# Altium PCB PCB3.PcbDoc
Units mil, origin at the board's own origin, x right, y up, seen from the top; angles counter-clockwise.
Board outline 3937.01 x 3937.01 mil, 2 copper layers (Top Layer, Bottom Layer); 62 components, 61 nets, 292 pads, 5 vias.
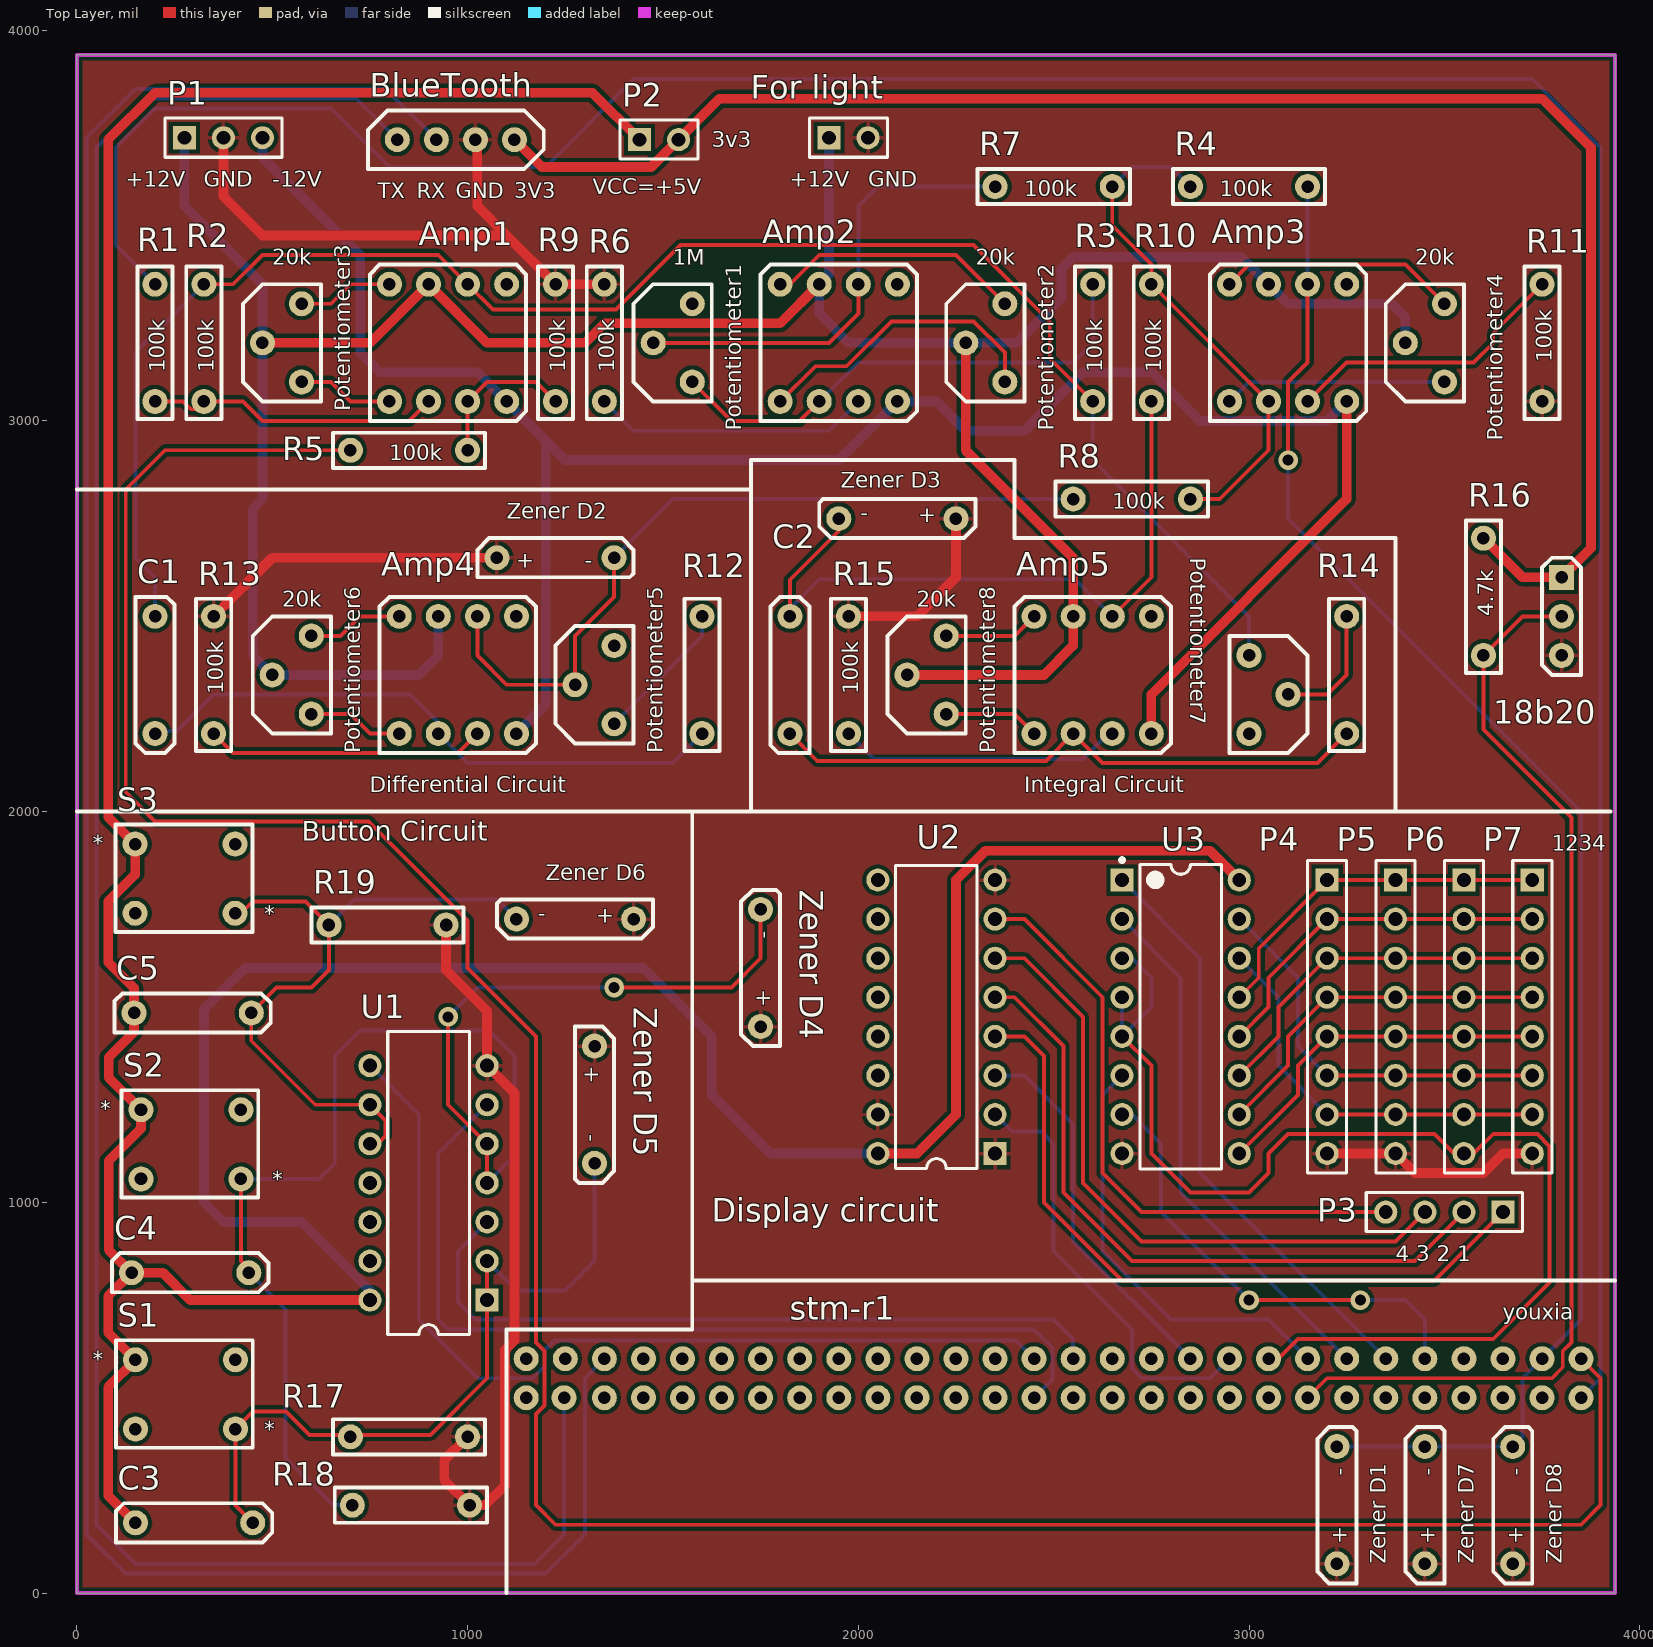
[diagram p0: Top Layer view]
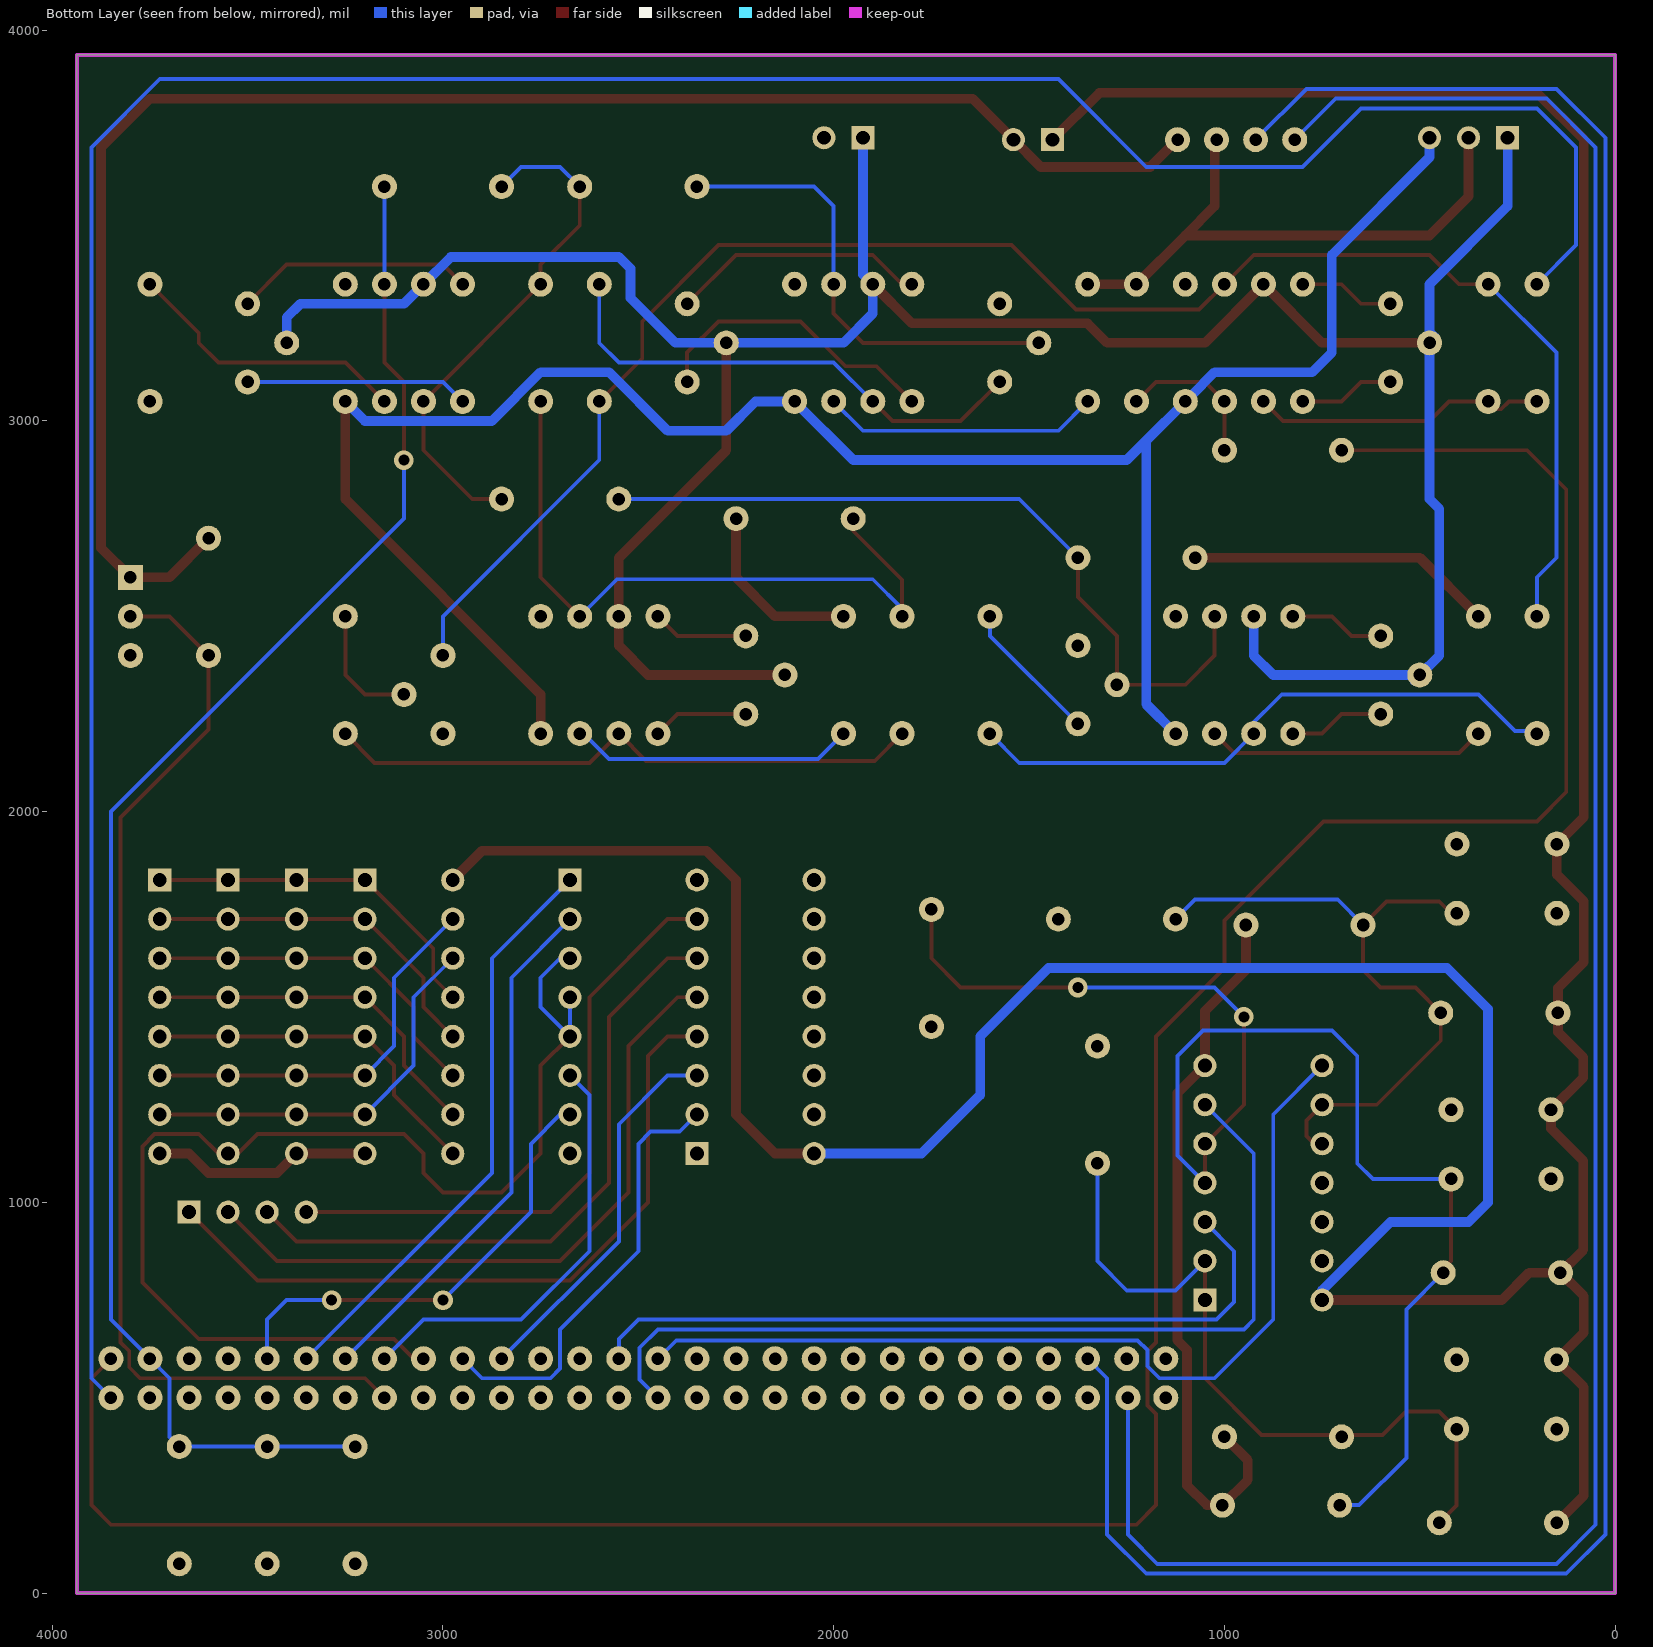
[diagram p1: Bottom Layer view, seen from below]

## Layer stack, top to bottom
Top Solder: solder mask 0.4, Solder Resist, Dk 3.5
Top Layer: signal copper 1.4
Dielectric 1: dielectric 12.6, FR-4, Dk 4.8
Bottom Layer: signal copper 1.4
Bottom Solder: solder mask 0.4, Solder Resist, Dk 3.5

## Board outline
0,0 3937.01,0 3937.01,3937.01 0,3937.01

## Design rules (kind name [scope] priority, off if disabled: settings)
Clearance [All] p1: gap=10 ignorepadtopadclearanceinfootprint=FALSE except(0: Arc-Hole Track-Hole SMDPad-Hole THPad-Hole Via-Hole Fill-Hole Poly-Hole Region-Hole Text-Hole)
PolygonConnect [All] p1: connectstyle=Relief reliefconductorwidth=10 reliefentries=4 polygonreliefangle="90 Angle" airgapwidth=10
RoutingVias [All] p1: holewidth=28 width=50 viastyle="Through Hole" minholewidth=28 minwidth=50 maxholewidth=28 maxwidth=50
SolderMaskExpansion [All] p1: expansion=4
Width PWR_Width [InNetClass('222')] p1: maxlimit=30 minlimit=25 preferedwidth=25
Width [All] p2: maxlimit=10 minlimit=10 preferedwidth=10
30 further rules are at their usual default settings.

## Classes and differential pairs
net class 222: 3v3 +12V -12V GND VCC

## Components (designator, comment, footprint, x,y, rotation, side; value= is the part's Value field where it differs from the comment)
18b20 "DS18b20" DS18b20 3800,2400 r90 top
Amp1 "OP07C" OP07C 800,3050 r0 top
Amp2 "OP07C" OP07C 1800,3050 r0 top
Amp3 "OP07C" OP07C 2950,3050 r0 top
Amp4 "OP07C" OP07C 825,2200 r0 top
Amp5 "OP07C" OP07C 2450,2200 r0 top
BlueTooth "hc_08" hc_08 820,3720 r0 top
C1 "DIP-2 Capacitance" "DIP-2 CAPACITANCE" 200,2500 r270 top
C2 "DIP-2 Capacitance" "DIP-2 CAPACITANCE" 1825,2200 r90 top
C3 "DIP-2 Capacitance" "DIP-2 CAPACITANCE" 150,180 r0 top
C4 "DIP-2 Capacitance" "DIP-2 CAPACITANCE" 140,820 r0 top
C5 "DIP-2 Capacitance" "DIP-2 CAPACITANCE" 146.3,1485 r0 top
"For light" "Header 2" HDR1X2 1925,3725 r0 top
P1 "Header 3" HDR1X3 275,3725 r0 top
P2 "Header 2" HDR1X2 1440,3720 r0 top
P3 "Header 4" HDR1X4 3650,975 r180 top
P4 "Header 8" HDR1X8 3200,1825 r270 top
P5 "Header 8" HDR1X8 3375,1825 r270 top
P6 "Header 8" HDR1X8 3550,1825 r270 top
P7 "Header 8" HDR1X8 3725,1825 r270 top
Potentiometer1 "Potentiometer3266" POTENTIOMETER3326 1575,3100 r90 top
Potentiometer2 "Potentiometer3266" POTENTIOMETER3326 2375,3100 r90 top
Potentiometer3 "Potentiometer3266" POTENTIOMETER3326 575,3100 r90 top
Potentiometer4 "Potentiometer3266" POTENTIOMETER3326 3500,3100 r90 top
Potentiometer5 "Potentiometer3266" POTENTIOMETER3326 1375,2225 r90 top
Potentiometer6 "Potentiometer3266" POTENTIOMETER3326 600,2250 r90 top
Potentiometer7 "Potentiometer3266" POTENTIOMETER3326 3000,2400 r270 top
Potentiometer8 "Potentiometer3266" POTENTIOMETER3326 2225,2250 r90 top
R1 "DIP-2 resistance" "DIRECT INSERTION RESISTANCE" 200,3350 r270 top
R2 "DIP-2 resistance" "DIRECT INSERTION RESISTANCE" 325,3050 r90 top
R3 "DIP-2 resistance" "DIRECT INSERTION RESISTANCE" 2600,3050 r90 top
R4 "DIP-2 resistance" "DIRECT INSERTION RESISTANCE" 2850,3600 r0 top
R5 "DIP-2 resistance" "DIRECT INSERTION RESISTANCE" 700,2925 r0 top
R6 "DIP-2 resistance" "DIRECT INSERTION RESISTANCE" 1350,3350 r270 top
R7 "DIP-2 resistance" "DIRECT INSERTION RESISTANCE" 2350,3600 r0 top
R8 "DIP-2 resistance" "DIRECT INSERTION RESISTANCE" 2550,2800 r0 top
R9 "DIP-2 resistance" "DIRECT INSERTION RESISTANCE" 1225,3350 r270 top
R10 "DIP-2 resistance" "DIRECT INSERTION RESISTANCE" 2750,3050 r90 top
R11 "DIP-2 resistance" "DIRECT INSERTION RESISTANCE" 3750,3050 r90 top
R12 "DIP-2 resistance" "DIRECT INSERTION RESISTANCE" 1600,2200 r90 top
R13 "DIP-2 resistance" "DIRECT INSERTION RESISTANCE" 350,2500 r270 top
R14 "DIP-2 resistance" "DIRECT INSERTION RESISTANCE" 3250,2500 r270 top
R15 "DIP-2 resistance" "DIRECT INSERTION RESISTANCE" 1975,2500 r270 top
R16 "4.7k" "Direct insertion resistance" 3600,2400 r90 top
R17 "DIP-2 resistance" "Direct insertion resistance" 1000,400 r180 top
R18 "DIP-2 resistance" "Direct insertion resistance" 1005,225 r180 top
R19 "DIP-2 resistance" "Direct insertion resistance" 945,1710 r180 top
S1 "dip-4 switch" "dip4 switch" 150,597.17 r0 top
S2 "dip-4 switch" "dip4 switch" 164.09,1237.17 r0 top
S3 "dip-4 switch" "dip4 switch" 149.09,1917.17 r0 top
stm-r1 "STM32Zeta-right" STM32zet6-right 1775,225 r90 top
U1 "SN74LS132N" N014 900,1050 r90 top
U2 "SN74LS139AN" N016 2200,1475 r90 top
U3 "SN74LS48N" N016D 2825,1475 r0 top
"Zener D1" "DIP-2  Zener diode" "DIP-2 ZENER DIODE" 3225,75 r90 top
"Zener D2" "DIP-2  Zener diode" "DIP-2 ZENER DIODE" 1075,2650 r0 top
"Zener D3" "DIP-2  Zener diode" "DIP-2 ZENER DIODE" 2250,2750 r180 top
"Zener D4" "DIP-2  Zener diode" "DIP-2 ZENER DIODE" 1750,1450 r90 top
"Zener D5" "DIP-2  Zener diode" "DIP-2 ZENER DIODE" 1325,1400 r270 top
"Zener D6" "DIP-2  Zener diode" "DIP-2 ZENER DIODE" 1425,1725 r180 top
"Zener D7" "DIP-2  Zener diode" "DIP-2 Zener Diode" 3450,75 r90 top
"Zener D8" "DIP-2  Zener diode" "DIP-2 Zener Diode" 3675,75 r90 top

## Footprints (in the part's own frame and the unit in brackets; to place one, negate y for a bottom-side part, rotate by r counter-clockwise, add the part's x,y. Pads: shape width x height; smd on the part's side, far side on the other; paste and mask are expansions set on the pad)
"dip4 switch" [mil]
  round 64 hole 32: 1(0,0) 2(255.91,0) 3(0,-177.17) 4(255.91,-177.17)
  silkscreen extent -50,-225 300,50
"DIP-2 CAPACITANCE" [mil]
  round 64 hole 32: 1(0,0) 2(300,0)
  silkscreen extent -50,-50 350,50
"DIP-2 ZENER DIODE" [mil]
  round 64 hole 32: 1(0,0) 2(300,0)
  silkscreen extent -50,-50 350,50
"DIP-2 Zener Diode" [mil]
  round 64 hole 32: 1(0,0) 2(300,0)
  silkscreen extent -50,-50 350,50
"DIRECT INSERTION RESISTANCE" [mil]
  round 64 hole 32: 1(0,0) 2(300,0)
  silkscreen extent -45,-45 345,45
"Direct insertion resistance" [mil]
  round 64 hole 32: 1(0,0) 2(300,0)
  silkscreen extent -45,-45 345,45
DS18b20 [mil]
  round 64 hole 32: 1(0,0) 2(100,0)
  rect 64x64 hole 32: 3(200,0)
  silkscreen extent -50,-50 250,50
hc_08 [mil]
  round 64 hole 32: 1(0,0) 2(100,0) 3(200,0) 4(300,0)
  silkscreen extent -75,-75 375,75
HDR1X2 [mm] "Connector; Header; 2 Position"
  rect 1.5x1.5 hole 0.9: 1(0,0)
  round 1.5 hole 0.9: 2(2.54,0)
  silkscreen extent -1.27,-1.27 3.81,1.27
HDR1X3 [mm] "Connector; Header; 3 Position"
  rect 1.5x1.5 hole 0.9: 1(0,0)
  round 1.5 hole 0.9: 2(2.54,0) 3(5.08,0)
  silkscreen extent -1.27,-1.27 6.35,1.27
HDR1X4 [mm] "Connector; Header; 4 Position"
  rect 1.5x1.5 hole 0.9: 1(0,0)
  round 1.5 hole 0.9: 2(2.54,0) 3(5.08,0) 4(7.62,0)
  silkscreen extent -1.27,-1.27 8.89,1.27
HDR1X8 [mm] "Connector; Header; 8 Position"
  rect 1.5x1.5 hole 0.9: 1(0,0)
  round 1.5 hole 0.9: 2(2.54,0) 3(5.08,0) 4(7.62,0) 5(10.16,0) 6(12.7,0) 7(15.24,0) 8(17.78,0)
  silkscreen extent -1.27,-1.27 19.05,1.27
N014 [mm] "DIP; 14 Leads; Row Spacing 7.62 mm; Pitch 2.54 mm"
  rect 1.5x1.5 hole 0.9: 1(-7.62,-3.81)
  round 1.5 hole 0.9: 2(-5.08,-3.81) 3(-2.54,-3.81) 4(0,-3.81) 5(2.54,-3.81) 6(5.08,-3.81) 7(7.62,-3.81) 8(7.62,3.81) 9(5.08,3.81) 10(2.54,3.81) 11(0,3.81) 12(-2.54,3.81) 13(-5.08,3.81) 14(-7.62,3.81)
  silkscreen extent -9.85,-2.65 9.85,2.65
N016 [mm] "DIP; 16 Leads; Row Spacing 7.62 mm; Pitch 2.54 mm"
  rect 1.5x1.5 hole 0.9: 1(-8.89,-3.81)
  round 1.5 hole 0.9: 2(-6.35,-3.81) 3(-3.81,-3.81) 4(-1.27,-3.81) 5(1.27,-3.81) 6(3.81,-3.81) 7(6.35,-3.81) 8(8.89,-3.81) 9(8.89,3.81) 10(6.35,3.81) 11(3.81,3.81) 12(1.27,3.81) 13(-1.27,3.81) 14(-3.81,3.81) 15(-6.35,3.81) 16(-8.89,3.81)
  silkscreen extent -9.85,-2.65 9.85,2.65
N016D [mm] "DIP, 16-Leads, Row Spacing 7.62mm, Pitch 2.54mm, Body 19.31x6.35mm"
  rect 1.5x1.5 hole 0.9: 1(-3.81,8.89)
  round 1.5 hole 0.9: 2(-3.81,6.35) 3(-3.81,3.81) 4(-3.81,1.27) 5(-3.81,-1.27) 6(-3.81,-3.81) 7(-3.81,-6.35) 8(-3.81,-8.89) 9(3.81,-8.89) 10(3.81,-6.35) 11(3.81,-3.81) 12(3.81,-1.27) 13(3.81,1.27) 14(3.81,3.81) 15(3.81,6.35) 16(3.81,8.89)
  silkscreen extent -3.93,-9.9 2.65,10.31, body extent -3.3,-9.9 3.3,9.9, height 5.08
OP07C [mil]
  round 64 hole 32: 1(0,0) 2(100,0) 3(200,0) 4(300,0) 5(300,300) 6(200,300) 7(100,300) 8(0,300)
  silkscreen extent -50,-50 350,350
POTENTIOMETER3326 [mil]
  round 64 hole 32: 1(0,0) 2(100,100) 3(200,0)
  silkscreen extent -50,-50 250,150
STM32zet6-right [mil]
  round 64 hole 32: 57(275,625) 58(375,625) 59(275,528.15) 60(375,525) 61(275,425) 62(375,425) 63(275,325) 64(375,325) 65(275,225) 66(375,225) 67(275,125) 68(375,125) 69(275,25) 70(375,25) 71(275,-75) 72(375,-75) 73(275,-175) 74(375,-175) 75(275,-275) 76(375,-275) 77(275,-375) 78(375,-375) 79(275,-475) 80(375,-475) 81(275,-575) 82(375,-575) 83(275,-675) 84(375,-675) 85(275,-775) 86(375,-775) 87(275,-875) 88(375,-875) 89(275,-975) 90(375,-975) 91(275,-1075) 92(375,-1075) 93(275,-1175) 94(375,-1175) 95(275,-1275) 96(375,-1275) 97(275,-1375) 98(375,-1375) 99(275,-1475) 100(375,-1475) 101(275,-1575) 102(375,-1575) 103(275,-1675) 104(375,-1675) 105(275,-1775) 106(375,-1775) 107(275,-1875) 108(375,-1875) 109(275,-1975) 110(375,-1975) 111(275,-2075) 112(375,-2075)

## Part data
"For light" P2: "Header, 2-Pin", LatestRevisionDate=17-Jul-2002, LatestRevisionNote="Re-released for DXP Platform.", Publisher="Altium Limited"
P1: "Header, 3-Pin", LatestRevisionDate=17-Jul-2002, LatestRevisionNote="Re-released for DXP Platform.", Publisher="Altium Limited"
P3: "Header, 4-Pin", LatestRevisionDate=17-Jul-2002, LatestRevisionNote="Re-released for DXP Platform.", Publisher="Altium Limited"
P4 P5 P6 P7: "Header, 8-Pin", LatestRevisionDate=17-Jul-2002, LatestRevisionNote="Re-released for DXP Platform.", Publisher="Altium Limited"
R16: library part "DIP-2 resistance"
U1: "Quadruple 2-Input Positive-NAND Schmitt Trigger", ComponentLink1Description="Manufacturer Link", ComponentLink1URL=http://www.ti.com/, ComponentLink2Description=Datasheet, ComponentLink2URL=http://www-s.ti.com/sc/ds/sn74ls132.pdf, DatasheetVersion=Mar-1988, LatestRevisionDate=04-Mar-2005, LatestRevisionNote="Stylized 3D Model Added.", PackageDescription="DIP; 14 Leads; Row Spacing 7.62 mm; Pitch 2.54 mm", PackageReference=N014, PackageVersion=Oct-1995, Published=8-Jun-2000, Publisher="Altium Limited"
U2: "Dual 2-Line to 4-Line Decoder / Demultiplexer", Code_JEDEC=MS-001-BB, ComponentLink1Description="Manufacturer Link", ComponentLink1URL=http://www.ti.com/, ComponentLink2Description=Datasheet, ComponentLink2URL=http://www-s.ti.com/sc/ds/sn74ls139a.pdf, DatasheetVersion=Mar-1988, LatestRevisionDate=04-Mar-2005, LatestRevisionNote="Stylized 3D Model Added.", PackageDescription="DIP; 16 Leads; Row Spacing 7.62 mm; Pitch 2.54 mm", PackageReference=N016, PackageVersion=Oct-1995, Published=8-Jun-2000, Publisher="Altium Limited"
U3: "BCD-to-Seven-Segment Decoder/Driver", Code_JEDEC=MS-001-BB, ComponentLink1Description="Manufacturer Link", ComponentLink1URL=http://www.ti.com/, DatasheetVersion=Mar-1988, LatestRevisionDate=29-May-2009, LatestRevisionNote="Component Body Added.", PackageDescription="DIP, 16-Pin, Row Spacing 7.62 mm, Pitch 2.54 mm", PackageReference=N016D, PackageVersion=Oct-1995, Published=8-Jun-2000, Publisher="Altium Limited"

## Via types
v1: diameter 50, hole 28, Top Layer to Bottom Layer, 5 vias

## Nets (pads, with @x,y where several pads share a name; then routed paths per layer and width w, separated by ;. In a path a pad name is that pad's centre, name@x,y a point inside that pad or via, vN(x,y) a via of type N, cw(c..) or ccw(c..) an arc to the next point about the centre after c; other vN are vias at no path point)
3v3: 18b20.3 BlueTooth.4 P2.2 R16.2 | length 4280.7
  Top Layer w25: BlueTooth.4 1190,3650 1470,3650 P2.2 1645,3825 3750,3825 3875,3700 3875,2675 18b20.3 3700,2600 R16.2
+12V: "For light.1" Amp1.7 Amp2.7 Amp3.7 Amp4.7 Amp5.7 P1.1 Potentiometer2.2 Potentiometer3.2 Potentiometer4.2 Potentiometer6.2 Potentiometer8.2 | length 7266.7
  Top Layer w25: Potentiometer3.2 750,3200 Amp1.7 1050,3200 1300,3200 1350,3250 1800,3250 Amp2.7 ; Potentiometer8.2 2475,2350 2550,2425 Amp5.7 2550,2650 2275,2925 Potentiometer2.2
  Bottom Layer w25: P1.1 275,3550 475,3350 475,3228.28 Potentiometer3.2@460.86,3214.14 ; Potentiometer3.2 475,2800 450,2775 450,2400 Potentiometer6.2 500,2335.86 514.14,2335.86 514.14,2350 875,2350 925,2400 Amp4.7 ; 1925,3725 1925,3375 Amp2.7 1900,3275 1975,3200 Potentiometer2.2 2405,3200 2520,3315 2520,3390 2550,3420 2980,3420 Amp3.7 3100,3300 3365,3300 3400,3265 Potentiometer4.2
-12V: Amp1.4 Amp2.4 Amp3.4 Amp4.4 Amp5.4 P1.3 | length 5338.5
  Top Layer w25: Amp5.4 2750,2300 3250,2800 Amp3.4
  Bottom Layer w25: P1.3 475,3675 725,3425 725,3175 775,3125 1025,3125 Amp1.4@1085.86,3064.14 ; Amp1.4 1200,2950 ; Amp4.4 1200,2275 1200,2950 ; Amp3.4 3200,3000 2875,3000 2750,3125 2575,3125 2425,2975 2275,2975 2200,3050 Amp2.4 1950,2900 1250,2900 1200,2950
GND: 18b20.1 "For light.2" "Zener D1.1" "Zener D2.1" "Zener D3.1" "Zener D4.1" "Zener D5.1" "Zener D6.1" "Zener D7.1" "Zener D8.1" BlueTooth.3 P1.2 P4.8 P5.8 P7.8 R6.1 R9.1 R11.1 R13.1 R15.1 R17.1 R18.1 R19.1 U1.7 U2.1 U2.8 U2.15 U3.8 | length 5198.7
  Top Layer w25: R13.1 500,2650 1075,2650 ; P1.2 375,3575 475,3475 1100,3475 ; R19.1 945,1595 1050,1490 U1.7 1120,1280 1120,647.07 1095.5,622.57 1095.5,275.5 1045,225 R18.1 940,290 940,340 R17.1 ; R6.1 R9.1 1100,3475 ; R15.1 2150,2500 2250,2600 2250,2750 ; P4.8 P5.8 3425,1075 3600,1075 3650,1125 P7.8 ; BlueTooth.3@1025,3695 1025,3715 BlueTooth.3 1020,3700 BlueTooth.3@1025,3695 ; BlueTooth.3@1025,3695 1025,3550 1100,3475
IO1: stm-r1.104 U3.7 | length 1195
  Top Layer w10: v1(3000,750) v1(3285,750)
  Bottom Layer w10: U3.7 2700,1225 2775,1150 2775,975 v1(3000,750) ; v1(3285,750) 3400,750 3450,700 stm-r1.104
IO2: stm-r1.102 U3.1 | length 1529.6
  Bottom Layer w10: U3.1 2875,1625 2875,1075 stm-r1.102 stm-r1.102@3375,600
IO3: stm-r1.100 U3.2 | length 1388.2
  Bottom Layer w10: U3.2 2825,1575 2825,1025 stm-r1.100 stm-r1.100@3275,600
IO4: stm-r1.98 U3.6 | length 1109.6
  Bottom Layer w10: U3.6 2625,1275 2625,875 2800,700 3050,700 stm-r1.98
IO5: P6.8 stm-r1.96 U3.3 U3.4 U3.5 | length 3038.7
  Top Layer w10: U3.5 2750,1350 2750,1125 2850,1025 3000,1025 3050,1075 3050,1125 3100,1175 3475,1175 3525,1125 P6.8 3575,1125 3625,1175 3737.97,1175 3769.53,1143.44 3769.53,794.53 3625,650 3125,650 stm-r1.96@3075,600
  Bottom Layer w10: U3.4 U3.5 2750,1500 2750,1575 2700,1625 U3.3
IO6: stm-r1.94 U2.2 | length 1120
  Bottom Layer w10: U2.2 2393.9,1181.1 2468.9,1181.1 2500,1150 2500,875 2700,675 2700,575 2725,550 2900,550 stm-r1.94
IO7: stm-r1.92 U2.3 | length 976
  Bottom Layer w10: U2.3 2425,1325 2550,1200 2550,900 stm-r1.92
NetAmp1_1: Amp1.1 Potentiometer3.1 | length 245.7
  Top Layer w10: Potentiometer3.1 650,3100 700,3050 Amp1.1
NetAmp1_2: Amp1.2 R1.2 R2.1 | length 766.3
  Top Layer w10: R1.2 271.72,3050 291.72,3030 333.28,3030 R2.1@339.14,3035.86 ; R2.1 425,3050 475,3000 850,3000 Amp1.2
NetAmp1_3: Amp1.3 R5.2 R9.2 | length 424.7
  Top Layer w10: R5.2@1000,2900 R5.2 Amp1.3 1050,3100 1175,3100 1205,3070 1233.28,3070 R9.2@1239.14,3064.14
NetAmp1_6: Amp1.6 C1.1 Potentiometer7.1 R2.2 R3.1 | length 4412.6
  Top Layer w10: R2.2 400,3350 475,3425 925,3425 Amp1.6 1065,3285 1380,3285 1545,3450 2295,3450 2490,3255 2490,3160 R3.1
  Bottom Layer w10: C1.1 200,2600 150,2650 150,3175 R2.2 ; R3.1 2600,2900 3000,2500 Potentiometer7.1
NetAmp1_8: Amp1.8 Potentiometer3.3 | length 245.7
  Top Layer w10: Potentiometer3.3 650,3300 700,3350 Amp1.8
NetAmp2_1: Amp2.1 Potentiometer2.1 | length 768.1
  Top Layer w10: Amp2.1 1890,3140 1970,3140 2085,3255 2295,3255 2375,3175 Potentiometer2.1
NetAmp2_2: Amp2.2 Potentiometer1.1 R3.2 | length 1299.3
  Top Layer w10: Potentiometer1.1 1675,3000 1850,3000 Amp2.2
  Bottom Layer w10: Amp2.2 2000,3150 2550,3150 2600,3200 R3.2
NetAmp2_3: Amp2.3 R6.2 | length 712.1
  Bottom Layer w10: R6.2 1425,2975 1925,2975 Amp2.3
NetAmp2_6: Amp2.6 Potentiometer1.2 R7.1 | length 1201.8
  Top Layer w10: Potentiometer1.2 1925,3200 2000,3275 Amp2.6
  Bottom Layer w10: Amp2.6 2000,3550 2050,3600 R7.1
NetAmp2_8: Amp2.8 Potentiometer2.3 | length 657.8
  Top Layer w10: Amp2.8 1825,3350 1900,3425 2250,3425 Potentiometer2.3
NetAmp3_1: Amp3.1 Potentiometer4.1 | length 570.7
  Bottom Layer w10: Amp3.1 3000,3100 Potentiometer4.1
NetAmp3_2: Amp3.2 R4.1 R7.2 R8.2 R10.2 | length 1333.9
  Top Layer w10: R7.2 2650,3500 2750,3400 R10.2 Amp3.2 3050,2925 2925,2800 R8.2
  Bottom Layer w10: R7.2 2700,3650 2800,3650 R4.1
NetAmp3_3: Amp3.3 R11.2 | length 738.9
  Top Layer w10: Amp3.3 3250,3150 3575,3150 3625,3200 3625,3225 R11.2
NetAmp3_8: Amp3.8 Potentiometer4.3 | length 612.1
  Top Layer w10: Amp3.8 3000,3400 3400,3400 Potentiometer4.3
NetAmp4_1: Amp4.1 Potentiometer6.1 | length 245.7
  Top Layer w10: Potentiometer6.1 700,2250 750,2200 Amp4.1
NetAmp4_2: Amp4.2 C1.2 R12.1 | length 1550.6
  Bottom Layer w10: C1.2@200,2206.3 256.3,2206.3 350,2300 853.28,2300 Amp4.2@939.14,2214.14 ; Amp4.2 1000,2125 1525,2125 R12.1
NetAmp4_3: Amp4.3 R13.2 | length 716.4
  Top Layer w10: R13.2 400,2150 975,2150 Amp4.3
NetAmp4_6: "Zener D2.2" Amp4.6 Potentiometer5.2 R8.1 | length 1984.6
  Top Layer w10: Amp4.6 1025,2400 1100,2325 Potentiometer5.2 1275,2450 1375,2550 1375,2650
  Bottom Layer w10: 1375,2650 1525,2800 R8.1
NetAmp4_8: Amp4.8 Potentiometer6.3 | length 245.7
  Top Layer w10: Potentiometer6.3 675,2450 725,2500 Amp4.8
NetAmp5_1: Amp5.1 Potentiometer8.1 | length 245.7
  Top Layer w10: Potentiometer8.1 2400,2250 Amp5.1
NetAmp5_2: Amp5.2 C2.1 R14.2 | length 1545.1
  Top Layer w10: C2.1 1895,2130 2480,2130 Amp5.2 2625,2125 3175,2125 R14.2
NetAmp5_3: Amp5.3 R15.2 | length 728.8
  Bottom Layer w10: R15.2 2040,2135 2575,2135 2640,2200 Amp5.3
NetAmp5_6: "Zener D3.2" Amp5.6 C2.2 R10.1 | length 1808.6
  Top Layer w10: C2.2 1825,2593.7 1950,2718.7 1950,2750 ; Amp5.6 2750,2600 R10.1
  Bottom Layer w10: C2.2 1825,2520 1900,2595 2555,2595 Amp5.6
NetAmp5_8: Amp5.8 Potentiometer8.3 | length 245.7
  Top Layer w10: Potentiometer8.3 2400,2450 Amp5.8
NetC3_2: "Zener D5.2" C3.2 R17.2 S1.4 U1.1 U1.2 | length 1893
  Top Layer w10: C3.2 405.91,224.09 S1.4 450.91,465 535,465 595,405 905,405 1050,550 U1.1 U1.2
  Bottom Layer w10: U1.2 1125,775 1250,775 1325,850 1325,1100
NetC4_2: "Zener D4.2" C4.2 R18.2 S2.4 U1.4 U1.5 | length 3839.4
  Top Layer w10: S2.4 420,850 C4.2@450,820 ; v1(950,1475) 950,1250 U1.5 U1.4 ; v1(1375,1550) 1675,1550 1750,1625 1750,1750
  Bottom Layer w10: S2.4 620,1060 660,1100 660,1375 725,1440 1055,1440 1120,1375 1120,1120 U1.4 ; C4.2 533.7,726.3 533.7,346.3 655,225 R18.2 ; v1(950,1475) 1025,1550 v1(1375,1550)
NetC5_2: "Zener D6.2" C5.2 R19.2 S3.4 U1.9 U1.10 | length 1751.8
  Top Layer w10: S3.4 420,1740 450,1770 585,1770 R19.2 645,1595 600,1550 511.3,1550 C5.2 446.3,1413.7 610,1250 U1.9 790,1210 790,1170 770,1150 U1.10
  Bottom Layer w10: R19.2 710,1775 1075,1775 1125,1725
NetP3_1: P3.1 U2.4 | length 1851
  Top Layer w10: U2.4 2425,1425 2475,1375 2475,1000 2675,800 3475,800 P3.1
NetP3_2: P3.2 U2.5 | length 1751
  Top Layer w10: U2.5 2400,1525 2525,1400 2525,1025 2700,850 3425,850 P3.2
NetP3_3: P3.3 U2.6 | length 1680.3
  Top Layer w10: U2.6 2425,1625 2575,1475 2575,1050 2725,900 3375,900 P3.3
NetP3_4: P3.4 U2.7 | length 1574.3
  Top Layer w10: U2.7 2425,1725 2625,1525 2625,1075 2725,975 P3.4
NetP4_1: P4.1 P5.1 P6.1 P7.1 U3.13 | length 918.2
  Top Layer w10: U3.13 3025,1575 3025,1650 P4.1 P5.1 P6.1 P7.1
NetP4_2: P4.2 P5.2 P6.2 P7.2 U3.12 | length 918.2
  Top Layer w10: U3.12 3050,1500 3050,1575 P4.2 P5.2 P6.2 P7.2
NetP4_3: P4.3 P5.3 P6.3 P7.3 U3.11 | length 918.2
  Top Layer w10: U3.11 3075,1425 3075,1500 P4.3 P5.3 P6.3 P7.3
NetP4_4: P4.4 P5.4 P6.4 P7.4 U3.10 | length 918.2
  Top Layer w10: U3.10 3100,1350 3100,1425 P4.4 P5.4 P6.4 P7.4
NetP4_5: P4.5 P5.5 P6.5 P7.5 U3.9 | length 918.2
  Top Layer w10: U3.9 3125,1275 3125,1350 P4.5 P5.5 P6.5 P7.5
NetP4_6: P4.6 P5.6 P6.6 P7.6 U3.15 | length 1018.2
  Top Layer w10: P4.6 P5.6 P6.6 P7.6
  Bottom Layer w10: U3.15 3125,1575 3125,1400 P4.6
NetP4_7: P4.7 P5.7 P6.7 P7.7 U3.14 | length 1018.2
  Top Layer w10: P4.7 P5.7 P6.7 P7.7
  Bottom Layer w10: U3.14 3075,1525 3075,1350 P4.7
NetPotentiometer5_1: Potentiometer5.1 R12.2 | length 368.2
  Bottom Layer w10: Potentiometer5.1 1600,2450 R12.2
NetPotentiometer7_2: Potentiometer7.2 R14.1 | length 320.7
  Top Layer w10: Potentiometer7.2 3200,2300 3250,2350 R14.1
PA4: R1.1 stm-r1.111 | length 7681.4
  Bottom Layer w10: R1.1 100,3450 100,3700 200,3800 650,3800 800,3650 1200,3650 1425,3875 3725,3875 3900,3700 3900,550 stm-r1.111
PA5: R5.1 stm-r1.112 | length 7151.8
  Top Layer w10: R5.1 225,2925 125,2825 125,2050 200,1975 746.47,1975 1000,1721.47 1000,1600 1175,1425 1175,641.47 1197,619.47 1197,480.53 1175,458.53 1175,225 1225,175 3850,175 3900,225 3900,550 stm-r1.112
PA7: "Zener D1.2" "Zener D7.2" "Zener D8.2" Amp3.6 R4.2 stm-r1.110 | length 4078.9
  Top Layer w10: v1(3100,2900) 3100,3100 3150,3150 Amp3.6
  Bottom Layer w10: v1(3100,2900) 3100,2750 3850,2000 3850,700 stm-r1.110 3700,550 3700,400 3675,375 3450,375 3225,375 ; Amp3.6 R4.2
PA9: BlueTooth.2 stm-r1.62 | length 6404.2
  Bottom Layer w10: BlueTooth.2 790,3850 150,3850 25,3725 25,150 125,50 1200,50 1300,150 1300,550 stm-r1.62
PA10: BlueTooth.1 stm-r1.59 | length 6009.6
  Bottom Layer w10: BlueTooth.1 715,3825 175,3825 50,3700 50,175 150,75 1171.85,75 1246.85,150 stm-r1.59
PB12: stm-r1.86 U1.3 | length 1900.6
  Bottom Layer w10: U1.3 975,875 975,744.73 1019.73,700 2500,700 2550,650 stm-r1.86
PB13: stm-r1.83 U1.6 | length 2351.1
  Bottom Layer w10: U1.6 925,1125 925,700 950,675 2450,675 2497,628 2497,547 stm-r1.83
PB14: stm-r1.84 U1.8 | length 2422.8
  Bottom Layer w10: U1.8 875,1225 875,700 1025,550 1166.47,550 1197,580.53 1197,622 1222,647 2403,647 stm-r1.84
PG0: 18b20.2 R16.1 stm-r1.97 | length 2851
  Top Layer w10: stm-r1.97 3200,550 3775,550 3803,578 3803,619.47 3825,641.47 3825,1985 3600,2210 R16.1 3700,2500 18b20.2
VCC: C3.1 C4.1 C5.1 P2.1 S1.1 S2.1 S3.1 U1.14 U2.16 U3.16 | length 10674.7
  Top Layer w25: C3.1 80,250 80,527.17 S1.1 80,667.17 80,760 C4.1 ; U1.14 290,750 220,820 C4.1 ; P2.1 1320,3840 200,3840 80,3720 80,1986.26 S3.1 149.09,1839.09 80,1770 80,1615 146.3,1548.7 C5.1 146.3,1436.3 81.26,1371.26 81.26,1320 S2.1 164.09,1189.09 81.26,1106.26 81.26,878.74 C4.1 ; U2.16 2150,1125 2250,1225 2250,1825 2325,1900 2900,1900 U3.16
  Bottom Layer w25: U1.14 750,775 575,950 375,950 325,1000 325,1495 430,1600 1450,1600 1625,1425 1625,1275 1775,1125 U2.16
pads on no net: Amp1.5 Amp2.5 Amp3.5 Amp4.5 Amp5.5 Potentiometer1.3 Potentiometer5.3 Potentiometer7.3 S1.2 S1.3 S2.2 S2.3 S3.2 S3.3 stm-r1.57 stm-r1.58 stm-r1.60 stm-r1.61 stm-r1.63 stm-r1.64 stm-r1.65 stm-r1.66 stm-r1.67 stm-r1.68 stm-r1.69 stm-r1.70 stm-r1.71 stm-r1.72 stm-r1.73 stm-r1.74 stm-r1.75 stm-r1.76 stm-r1.77 stm-r1.78 stm-r1.79 stm-r1.80 stm-r1.81 stm-r1.82 stm-r1.85 stm-r1.87 stm-r1.88 stm-r1.89 stm-r1.90 stm-r1.91 stm-r1.93 stm-r1.95 stm-r1.99 stm-r1.101 stm-r1.103 stm-r1.105 stm-r1.106 stm-r1.107 stm-r1.108 stm-r1.109 U1.11 U1.12 U1.13 U2.9 U2.10 U2.11 U2.12 U2.13 U2.14

## Polygon pours and split planes (outlines as drawn)
GND on Top Layer "GND_L01_P026" (solid, remove dead copper, pour order 26): -300,4200 4300,4200 4375,4125 4275,4025 4275,-300 -225,-300 -275,-250

## Keep-outs
Keep-Out Layer:
  the board outline again, w10

## Silkscreen, mask and mechanical layers (free items; w line width, h text height)
Top Overlay:
  lines w10: 0,2000 1575,2000 ; 0,2825 1725,2825 ; 1100,0 1100,675 1575,675 1575,2000 ; 1575,800 3937.01,800 ; 1725,2000 1725,2825 ; 3375,2000 3375,2700 2400,2700 2400,2900 1725,2900 1725,2825 ; 3925,2000 1575,2000
  text "3v3" at 1625,3700 h40
  text "+12V" at 125,3600 h40
  text "GND" at 325,3600 h40
  text "-12V" at 500,3600 h40
  text "+12V" at 1825,3600 h40
  text "GND" at 2025,3600 h40
  text "VCC=+5V" at 1320,3580 h40
  text "100k" at 2425,3575 h40
  text "100k" at 2925,3575 h40
  text "20k" at 500,3400 h40
  text "1M" at 1525,3400 h40
  text "20k" at 2300,3400 h40
  text "20k" at 3425,3400 h40
  text "100k" at 3775,3150 h40 r90
  text "100k" at 225,3125 h40 r90
  text "100k" at 350,3125 h40 r90
  text "100k" at 1250,3125 h40 r90
  text "100k" at 1375,3125 h40 r90
  text "100k" at 2625,3125 h40 r90
  text "100k" at 2775,3125 h40 r90
  text "100k" at 800,2900 h40
  text "100k" at 2650,2775 h40
  text "20k" at 525,2525 h40
  text "20k" at 2150,2525 h40
  text "4.7k" at 3625,2500 h40 r90
  text "100k" at 375,2300 h40 r90
  text "100k" at 2000,2300 h40 r90
  text "Differential Circuit" at 750,2050 h40
  text "Integral Circuit" at 2425,2050 h40
  text "Button Circuit" at 575,1925 h50
  text "*" at 40,1900 h40
  text "1234" at 3775,1900 h40
  text "*" at 480,1720 h40
  text "*" at 60,1220 h40
  text "*" at 500,1040 h40
  text "Display circuit" at 1625,950 h60
  text "4 3 2 1" at 3375,850 h40
  text "*" at 40,580 h40
  text "*" at 480,400 h40

## Text inside footprints (layer, text, board x,y; h text height)
BlueTooth: Top Overlay "TX" at 770,3570 h39.37; Top Overlay "RX" at 870,3570 h39.37; Top Overlay "GND" at 970,3570 h39.37; Top Overlay "3V3" at 1120,3570 h39.37
stm-r1: Top Overlay "youxia" at 3650,700 h40
"Zener D1": Top Overlay "+" at 3250,125 h40 r90; Top Overlay "-" at 3250,300 h40 r90
"Zener D2": Top Overlay "-" at 1300,2625 h40; Top Overlay "+" at 1125,2625 h40
"Zener D3": Top Overlay "+" at 2200,2775 h40 r180; Top Overlay "-" at 2025,2775 h40 r180
"Zener D4": Top Overlay "-" at 1775,1675 h40 r90; Top Overlay "+" at 1775,1500 h40 r90
"Zener D5": Top Overlay "+" at 1300,1350 h40 r270; Top Overlay "-" at 1300,1175 h40 r270
"Zener D6": Top Overlay "-" at 1200,1750 h40 r180; Top Overlay "+" at 1375,1750 h40 r180
"Zener D7": Top Overlay "+" at 3475,125 h40 r90; Top Overlay "-" at 3475,300 h40 r90
"Zener D8": Top Overlay "+" at 3700,125 h40 r90; Top Overlay "-" at 3700,300 h40 r90